# Altium PCB optronik.PcbDoc (part 1 of 2)
Units mm, origin at the board's own origin, x right, y up, seen from the top; angles counter-clockwise.
Board outline 329.68 x 214.42 mm, 2 copper layers (Top Layer, Bottom Layer); 87 components, 162 nets, 420 pads, 75 vias.
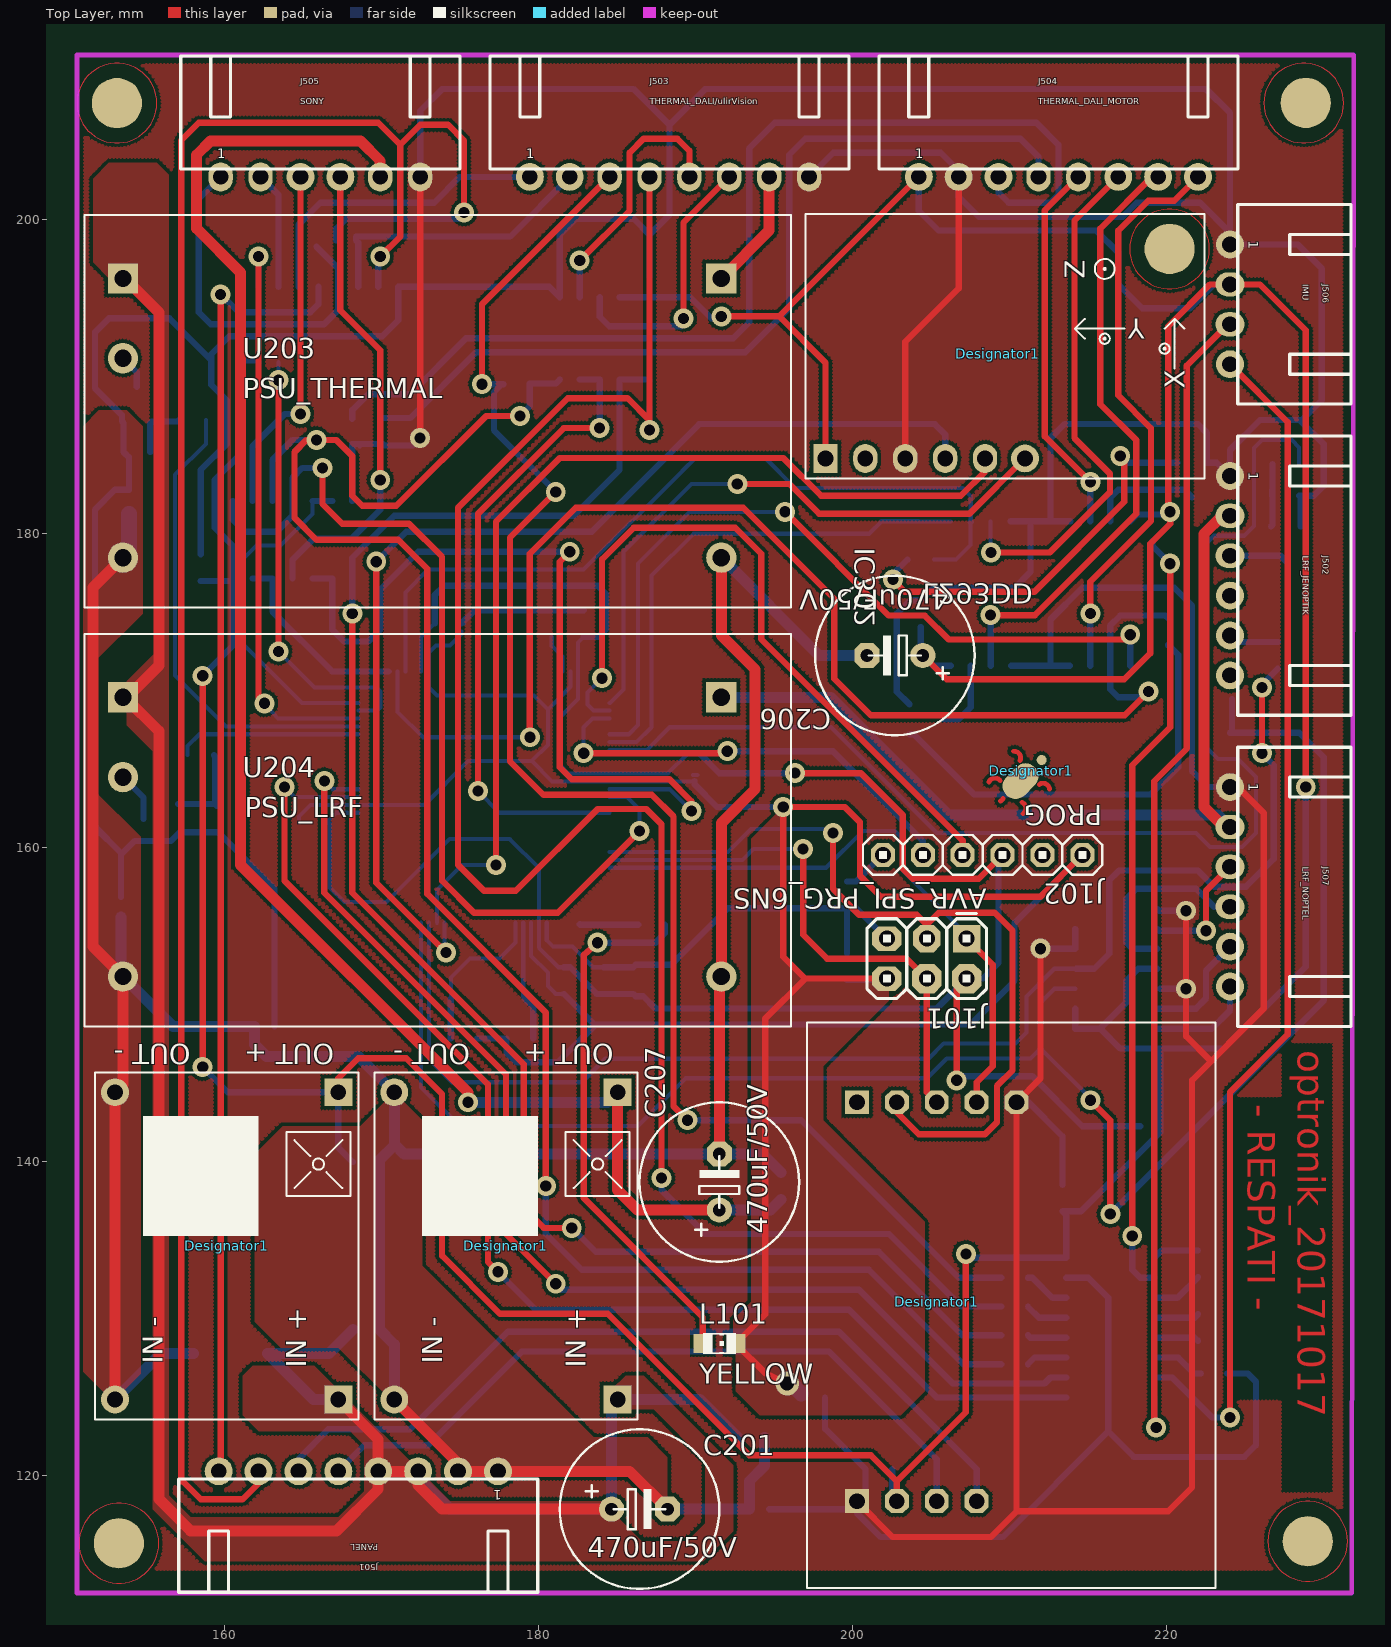
[diagram p0: Top Layer view]
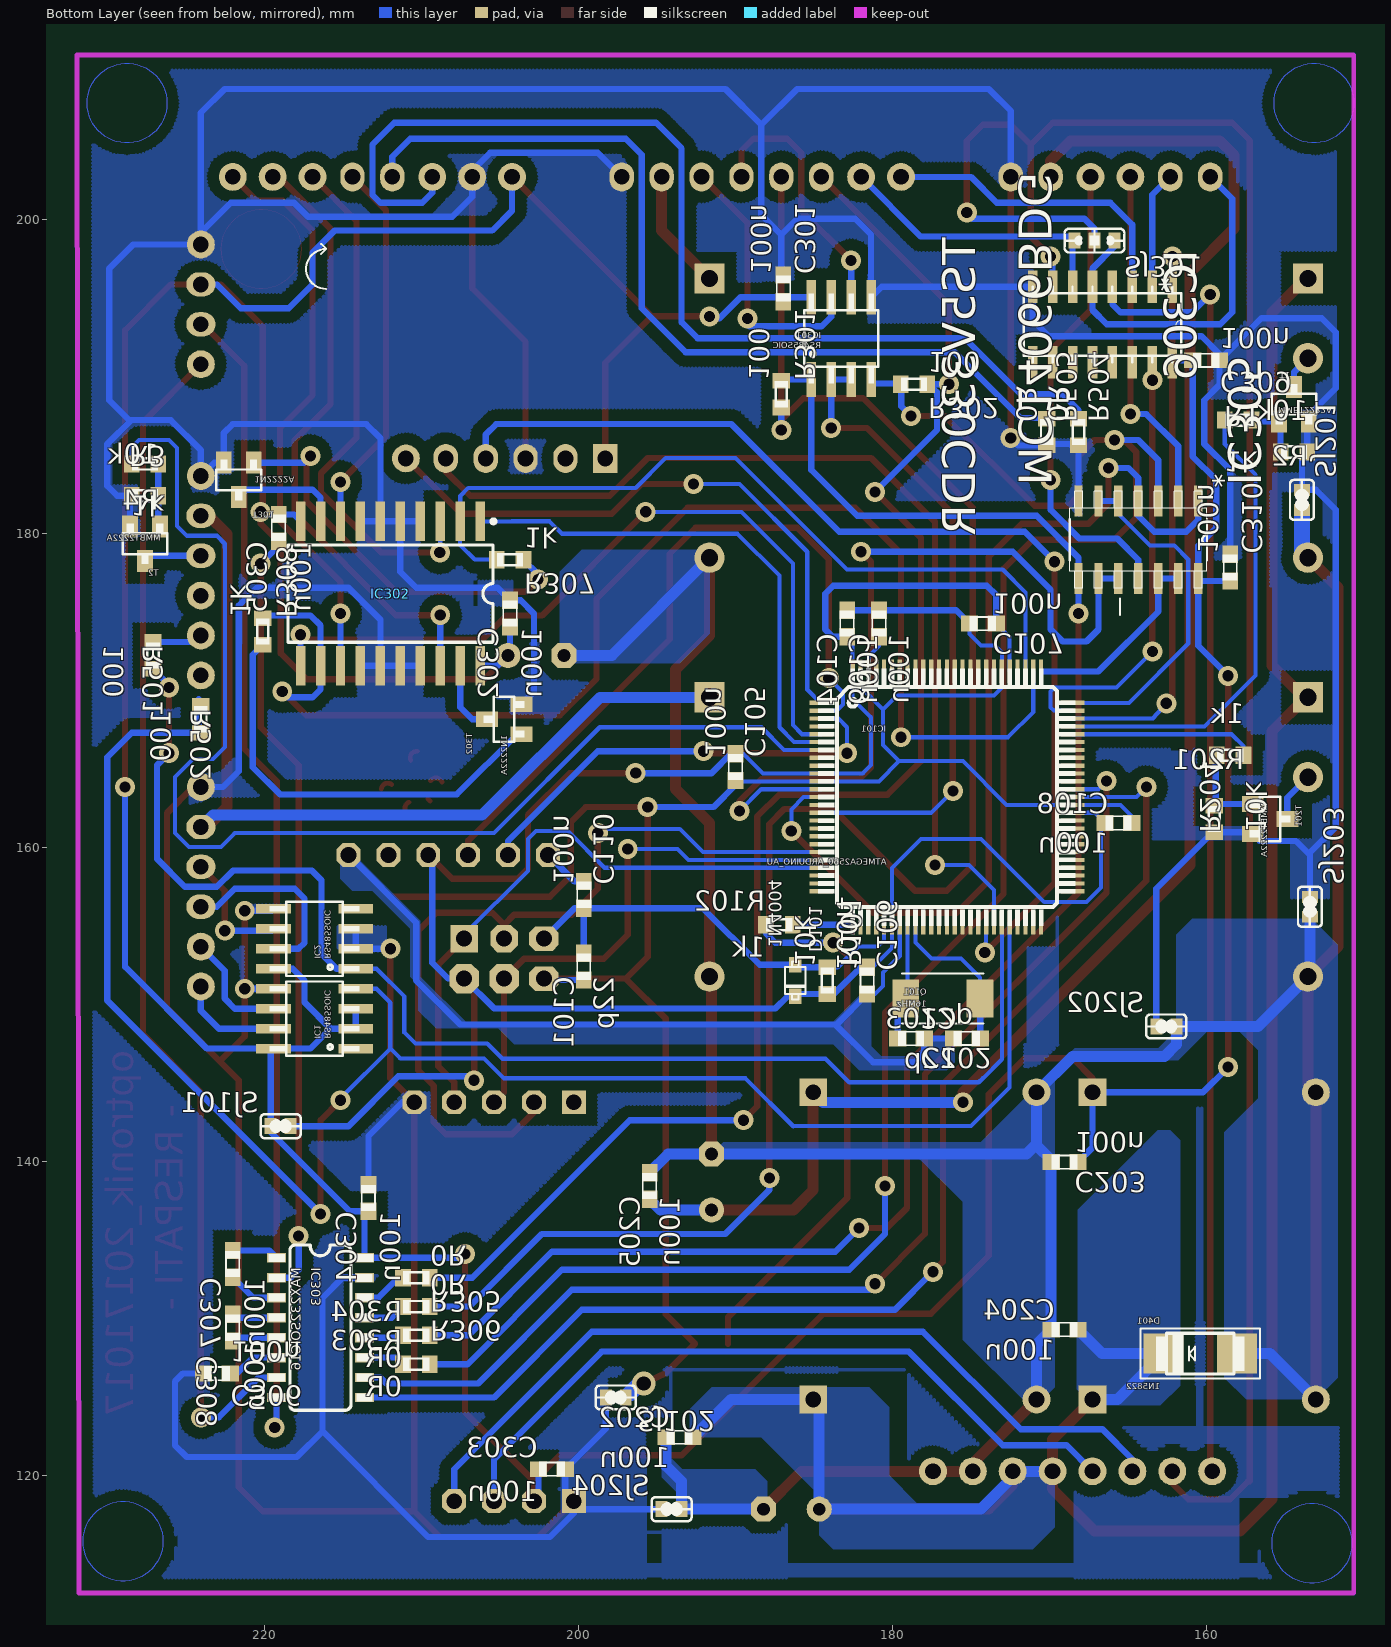
[diagram p1: Bottom Layer view, seen from below]

## Layer stack, top to bottom
Top Solder: solder mask 0.0102, Solder Resist, Dk 3.5
Top Layer: signal copper 0.0356
Dielectric1: dielectric 0.32, FR-4, Dk 4.8
Bottom Layer: signal copper 0.0356
Bottom Solder: solder mask 0.0102, Solder Resist, Dk 3.5

## Board outline
1.278,4.242 330.954,4.242 330.954,218.658 1.278,218.658

## Design rules (kind name [scope] priority, off if disabled: settings)
Clearance [All] p1: gap=0.22
FabricationTestPointUsage TestPointUsage [All] p1: valid=0 allowmultiple=FALSE
FabricationTestpoint Testpoint [All] p1: side=3 testpointundercomponent=TRUE minsize=1.016 maxsize=2.54 preferedsize=1.524 minholesize=0 maxholesize=1.016 preferedholesize=0.813 testpointgrid=0.025 allowsidetop=TRUE allowsidebottom=TRUE usegrid=TRUE gridtolerance=0
PlaneConnect [All] p1: planeconnectstyle=Direct reliefexpansion=0.508 reliefentries=4 reliefconductorwidth=0.254 reliefairgap=0.254
PolygonConnect [All] p1: connectstyle=Direct reliefconductorwidth=0.254 reliefentries=4 polygonreliefangle="90 Angle" airgapwidth=0.254
RoutingVias [All] p1: holewidth=0.711 width=1.27 viastyle="Through Hole" minholewidth=0.711 minwidth=1.27 maxholewidth=0.711 maxwidth=1.27
SolderMaskExpansion [All] p1: expansion=0.102
UnpouredPolygon [All] p1: allowunpoured=FALSE
Width [All] p1: maxlimit=1 minlimit=0.27 preferedwidth=0.27
26 further rules are at their usual default settings.

## Components (designator, comment, footprint, x,y, rotation, side; value= is the part's Value field where it differs from the comment)
C101 "22p" C0603 199.644,152.4 r270 bottom
C102 "22p" C0603 178.816,147.828 r180 bottom
C103 "22p" C0603 175.26,147.828 r0 bottom
C104 "100n" C0603 182.88,174.244 r270 bottom
C105 "100n" C0603 189.992,165.1 r90 bottom
C106 "100n" C0603 181.61,151.511 r90 bottom
C107 "100n" C0603 174.244,174.244 r180 bottom
C108 "100n" C0603 165.608,161.544 r0 bottom
C109 "100n" C0603 180.848,174.244 r270 bottom
C110 "100n" C0603 199.644,156.972 r90 bottom
C201 "470uF/50V" E3,5-10 186.436,117.856 r0 top
C202 "100n" C0603 193.548,122.428 r0 bottom
C203 "100n" C0603 169.037,139.954 r180 bottom
C204 "100n" C0603 169.037,129.286 r0 bottom
C205 "100n" C0603 195.453,138.43 r270 bottom
C206 "470uF/50V" E3,5-10 202.692,172.212 r180 top
C207 "470uF/50V" E3,5-10 191.516,138.684 r90 top
C301 "100n" C0603 186.944,195.58 r90 bottom
C302 "100n" C0603 204.343,174.879 r270 bottom
C303 "100n" C0603 201.676,120.396 r0 bottom
C304 "100n" C0603 213.36,137.668 r270 bottom
C305 "100n" C0603 219.075,180.34 r270 bottom
C306 "100n" C0603 223.012,126.492 r180 bottom
C307 "100n" C0603 221.996,133.477 r270 bottom
C308 "100n" C0603 221.996,129.413 r270 bottom
C309 "100n" C0603 160.02,191.008 r180 bottom
C310 "100n" C0603 158.496,177.8 r90 bottom
D101 "1N4004" SOD-323F 186.182,151.511 r90 bottom
D401 "1N5822" SMADIODE 160.401,127.762 r0 bottom
Designator1 "Comment" KURRO-LOGO 210.693,164.211 r0 top (schematic designator U$1)
Designator1 "Comment" GY-80-MINH1 222.404,183.488 r90 top (schematic designator U1)
Designator1 "Comment" MP1584_MIN 168.529,123.571 r90 top (schematic designator U201)
Designator1 "Comment" MP1584_MIN 186.309,123.571 r90 top (schematic designator U202)
Designator1 "Comment" MCP2515_CAN2 197.104,148.844 r270 top (schematic designator U301)
IC1 "RS485SOIC" SO08#1 216.789,149.087 r90 bottom
IC2 "RS485SOIC" SO08#1 216.789,154.167 r90 bottom
IC101 "ATMEGA2560_ARDUINO_AU" TQFP-100-14X14MM 176.53,163.195 r0 bottom
IC301 "RS485SOIC" SO08#2 183.261,192.394 r0 bottom
IC302 "L293DD" SO20 211.963,176.149 r0 bottom
IC303 "MAX232SOIC16" SO016 216.408,129.413 r270 bottom
IC305 "MC14066BDG" SOIC127P600X175-14N 164.338,179.578 r90 bottom
IC306 "TS5V330CDR" SOIC127P600X175-16N 171.069,190.881 r270 bottom
J101 "AVR_SPI_PRG_6NS" 2X3-NS 204.724,152.908 r180 top
J102 "PROG" 1X06 208.28,159.512 r180 top
J501 "PANEL" XH-8-RA#1 168.529,120.269 r180 top
J502 "LRF_JENOPTIK" XH-6-RA#1 224.028,177.292 r270 top
J503 "THERMAL_DALI/ulirVision" XH-8-RA#2 188.341,202.681 r0 top
J504 "THERMAL_DALI_MOTOR" XH-8-RA#3 213.106,202.681 r0 top
J505 "SONY" XH-6-RA#2 166.116,202.681 r0 top
J506 "IMU" XH-4-RA 224.028,194.564 r270 top
J507 "LRF_NOPTEL" XH-6-RA#3 224.028,157.48 r270 top
L101 "YELLOW" CHIP-LED0805 191.516,128.397 r270 top
Q101 "16MHz" CRYSTAL-TXC-7A2 176.784,150.368 r0 bottom
R1 "1k" R0603#1 157.988,187.198 r180 bottom
R2 "10k" R0603#1 154.432,185.166 r0 bottom
R3 "1k" R0603#1 227.584,184.404 r180 bottom
R4 "10k" R0603#1 227.584,182.372 r0 bottom
R101 "10k" R0603#2 184.15,151.511 r90 bottom
R102 "1k" R0603#2 187.198,155.067 r0 bottom
R201 "1k" R0603#1 158.496,165.862 r0 bottom
R204 "10k" R0603#1 159.512,161.798 r90 bottom
R301 "100" R0603#2 187.071,188.849 r90 bottom
R302 "100" R0603#2 178.621,189.484 r180 bottom
R303 "0R" R0603#2 210.312,127.092 r0 bottom
R304 "0R" R0603#2 210.312,128.924 r0 bottom
R305 "0R" R0603#2 210.312,132.588 r180 bottom
R306 "0R" R0603#2 210.312,130.756 r180 bottom
R307 "1k" R0603#2 204.343,178.308 r180 bottom
R308 "1k" R0603#2 220.091,173.736 r90 bottom
R501 "100" R0603#1 227.076,172.212 r270 bottom
R502 "100" R0603#1 224.028,168.148 r270 bottom
R504 "0R" R0603#2 168.148,186.436 r90 bottom
R505 "0R" R0603#2 170.18,186.436 r90 bottom
SJ101 "Comment" SJS 218.948,142.24 r0 bottom
SJ102 "Comment" SJS 197.612,124.968 r180 bottom
SJ201 "Comment" SJS 153.924,182.118 r90 bottom
SJ202 "Comment" SJS 162.56,148.59 r0 bottom
SJ203 "Comment" SJS 153.416,156.21 r90 bottom
SJ204 "Comment" SJS 194.056,117.856 r0 bottom
SJ301 "Comment" SJ_2S 167.132,198.628 r180 bottom
T1 "MMBT2222A" SOT23#1 154.432,188.214 r180 bottom
T2 "MMBT2222A" SOT23#1 227.584,179.324 r0 bottom
T201 "MMBT2222A" SOT23#1 155.956,161.798 r270 bottom
T301 "1N2222A" SOT23#2 221.615,183.388 r180 bottom
T302 "1N2222A" SOT23#2 204.724,168.148 r270 bottom
U203 "PSU_THERMAL" MOD_LM2596 196.088,175.26 r0 top
U204 "PSU_LRF" MOD_LM2596 196.088,148.59 r0 top

## Footprints (in the part's own frame and the unit in brackets; to place one, negate y for a bottom-side part, rotate by r counter-clockwise, add the part's x,y. Pads: shape width x height; smd on the part's side, far side on the other; paste and mask are expansions set on the pad)
1X06 [mil]
  oct 60x60 hole 40: 1(-250,0) 2(-150,0) 3(-50,0) 4(50,0) 5(150,0) 6(250,0)
  silkscreen extent -300,-50 300,50
2X3-NS [mil]
  rect 68.9x68.9 hole 40: 1(-100,-50)
  oct 74x74 hole 40: 2(-100,50) 4(0,50)
  oct 68.9x68.9 hole 40: 3(0,-50)
  oct 74x61.02 hole 40: 5(100,-50) 6(100,50)
  silkscreen extent -150,-113 150,100
C0603 [mm]
  rect 1.1x1 smd: 1(0.85,0) 2(-0.85,0)
  silkscreen extent -0.83,-0.48 0.84,0.47
CHIP-LED0805 [mm]
  rect 1.2x1.2 smd: A(0,-1.05) C(0,1.05)
  silkscreen extent -0.68,-1.05 0.68,1.05
CRYSTAL-TXC-7A2 [mm]
  rect 1.7x2.4 smd: P$1(-2.358,0) P$2(2.358,0)
  silkscreen extent -2.6,-1.6 2.6,1.6
E3,5-10 [mil]
  round 63 hole 32: +(-70,0)
  oct 63x63 hole 32: -(70,0)
  silkscreen extent -200,-200 200,200
GY-80-MINH1 [mm]
  rect 1.85x1.55 hole 1: 1(1.27,24.13)
  oval 1.85x1.55 hole 1: 2(1.27,21.59) 3(1.27,19.05) 4(1.27,16.51) 5(1.27,13.97)
  round 1.778 hole 1: 6(1.27,11.43)
  round 3.2 smd: ""(14.605,2.223)
  Top Layer circle w0.008: c14.605,2.223 r2.54
  Top Layer circle w0.008: c14.605,2.223 r2.54
  silkscreen extent 0,0 16.83,25.4
KURRO-LOGO [mil]
  oval 100x65 smd rot 45: P$1(0,0)
  round 25 smd: P$2(53.03,53.03)
  Top Layer lines w12.01: -79.33,-2.02 cw(c-64.25,-8.62) -50.66,0.65 ; -50.2,-50.2 -43.82,-43.82 ; -17.98,74.86 cw(c-16.18,58.5) -1.34,51.39 ; 3.54,-53 cw(c-3.07,-68.07) 6.22,-81.65 ; 46.68,-8.51 cw(c56.42,-21.77) 72.83,-20.52
MCP2515_CAN2 [mil]
  rect 60x60 hole 39.37: 1(1200,125) 5(200,125)
  oct 60x60 hole 39.37: 2(1200,225) 3(1200,325) 4(1200,425) 6(200,225) 7(200,325) 8(200,425) 9(200,525)
  silkscreen extent 0,0 1417,1024
MOD_LM2596 [mil]
  rect 76x76 hole 43.31: 1(-1675,825) 2(-175,825)
  round 76 hole 43.31: 3(-1675,125) 4(-175,125) 5(-1675,625)
  silkscreen extent -1772,0 0,984
MP1584_MIN [mil]
  rect 70x70 hole 39.37: 1(50,50) 3(820.08,50)
  round 70 hole 39.37: 2(50,609.85) 4(820.08,609.85)
  silkscreen extent 0,0 870,660
R0603#1 [mm]
  rect 1x1.1 smd: 1(-0.85,0) 2(0.85,0)
  silkscreen extent -0.84,-0.43 0.84,0.43
R0603#2 [mm]
  rect 1x1.1 smd: 1(0.85,0) 2(-0.85,0)
  silkscreen extent -0.84,-0.43 0.84,0.43
SJ_2S [mil]
  rect 30x40 smd: 1(50,0) 2(0,0) 3(-50,0)
  silkscreen extent -75,-30 75,30
SJS [mil]
  rect 30x40 smd: 1(25,0) 2(-25,0)
  silkscreen extent -50,-30 50,30
SMADIODE [mil]
  rect 100x100 smd: A(-92.5,0) C(92.5,0)
  silkscreen extent -150,-63 149,63
SO08#1 [mil]
  rect 24x87 smd: 1(-75,-103) 2(-25,-103) 3(25,-103) 4(75,-103) 5(75,103) 6(25,103) 7(-25,103) 8(-75,103)
  silkscreen extent -93,-113 93,113
SO08#2 [mil]
  rect 24x87 smd: 1(75,103) 2(25,103) 3(-25,103) 4(-75,103) 5(-75,-103) 6(-25,-103) 7(25,-103) 8(75,-103)
  silkscreen extent -93,-113 93,113
SO016 [mm]
  rect 0.6x1.2 smd: 1(-4.445,-2.8) 2(-3.175,-2.8) 3(-1.905,-2.8) 4(-0.635,-2.8) 5(0.635,-2.8) 6(1.905,-2.8) 7(3.175,-2.8) 8(4.445,-2.8) 9(4.445,2.8) 10(3.175,2.8) 11(1.905,2.8) 12(0.635,2.8) 13(-0.635,2.8) 14(-1.905,2.8) 15(-3.175,2.8) 16(-4.445,2.8)
  silkscreen extent -5.26,-3.3 5.26,3.37
SO20 [mm] "Small Outline, Plastic; 20 Leads; Body Width 7.5 mm; Pitch 1.27 mm"
  rect 0.6x2.5 smd: 1(-5.715,-4.6) 2(-4.445,-4.6) 3(-3.175,-4.6) 4(-1.905,-4.6) 5(-0.635,-4.6) 6(0.635,-4.6) 7(1.905,-4.6) 8(3.175,-4.6) 9(4.445,-4.6) 10(5.715,-4.6) 11(5.715,4.6) 12(4.445,4.6) 13(3.175,4.6) 14(1.905,4.6) 15(0.635,4.6) 16(-0.635,4.6) 17(-1.905,4.6) 18(-3.175,4.6) 19(-4.445,4.6) 20(-5.715,4.6)
  silkscreen extent -6.69,-4.72 6.53,3.1
SOD-323F [mm]
  rect 1x0.8 smd: A(1,0) C(-1,0)
  silkscreen extent -1.2,-0.65 1.2,0.65
SOIC127P600X175-14N [mil]
  rect 78x21 smd: 1(97,-150) 2(97,-100) 3(97,-50) 4(97,0) 5(97,50) 6(97,100) 7(97,150) 8(-97,150) 9(-97,100) 10(-97,50) 11(-97,0) 12(-97,-50) 13(-97,-100) 14(-97,-150)
  silkscreen extent -188,-172 122,172
SOIC127P600X175-16N [mil]
  rect 81x24 smd: 1(-189,350) 2(-189,300) 3(-189,250) 4(-189,200) 5(-189,150) 6(-189,100) 7(-189,50) 8(-189,0) 9(0,0) 10(0,50) 11(0,100) 12(0,150) 13(0,200) 14(0,250) 15(0,300) 16(0,350)
  silkscreen extent -189,-22 0,372
SOT23#1 [mm]
  rect 1x1.4 smd: 1(-0.95,-1.1) 2(0.95,-1.1) 3(0,1.1)
  silkscreen extent -1.42,-1.3 1.42,1.3
SOT23#2 [mm]
  rect 1x1.4 smd: 1(0.95,1.1) 2(-0.95,1.1) 3(0,-1.1)
  silkscreen extent -1.42,-1.3 1.42,1.3
TQFP-100-14X14MM [mm]
  rect 1.5x0.27 smd: 1(8,-6) 2(8,-5.5) 3(8,-5) 4(8,-4.5) 5(8,-4) 6(8,-3.5) 7(8,-3) 8(8,-2.5) 9(8,-2) 10(8,-1.5) 11(8,-1) 12(8,-0.5) 13(8,0) 14(8,0.5) 15(8,1) 16(8,1.5) 17(8,2) 18(8,2.5) 19(8,3) 20(8,3.5) 21(8,4) 22(8,4.5) 23(8,5) 24(8,5.5) 25(8,6) 51(-8,6) 52(-8,5.5) 53(-8,5) 54(-8,4.5) 55(-8,4) 56(-8,3.5) 57(-8,3) 58(-8,2.5) 59(-8,2) 60(-8,1.5) 61(-8,1) 62(-8,0.5) 63(-8,0) 64(-8,-0.5) 65(-8,-1) 66(-8,-1.5) 67(-8,-2) 68(-8,-2.5) 69(-8,-3) 70(-8,-3.5) 71(-8,-4) 72(-8,-4.5) 73(-8,-5) 74(-8,-5.5) 75(-8,-6)
  rect 0.27x1.5 smd: 26(6,8) 27(5.5,8) 28(5,8) 29(4.5,8) 30(4,8) 31(3.5,8) 32(3,8) 33(2.5,8) 34(2,8) 35(1.5,8) 36(1,8) 37(0.5,8) 38(0,8) 39(-0.5,8) 40(-1,8) 41(-1.5,8) 42(-2,8) 43(-2.5,8) 44(-3,8) 45(-3.5,8) 46(-4,8) 47(-4.5,8) 48(-5,8) 49(-5.5,8) 50(-6,8) 76(-6,-8) 77(-5.5,-8) 78(-5,-8) 79(-4.5,-8) 80(-4,-8) 81(-3.5,-8) 82(-3,-8) 83(-2.5,-8) 84(-2,-8) 85(-1.5,-8) 86(-1,-8) 87(-0.5,-8) 88(0,-8) 89(0.5,-8) 90(1,-8) 91(1.5,-8) 92(2,-8) 93(2.5,-8) 94(3,-8) 95(3.5,-8) 96(4,-8) 97(4.5,-8) 98(5,-8) 99(5.5,-8) 100(6,-8)
  silkscreen extent -8.2,-8.2 8.2,8.2
XH-4-RA [mm]
  round 1.778 hole 1: 1(-3.81,0) 4(3.81,0)
  oval 1.55x1.85 hole 1: 2(-1.27,0) 3(1.27,0)
  silkscreen extent -6.35,0.5 6.35,7.7
XH-6-RA#1 [mm]
  round 1.778 hole 1: 1(-6.35,0) 4(1.27,0) 5(3.81,0) 6(6.35,0)
  oval 1.55x1.85 hole 1: 2(-3.81,0) 3(-1.27,0)
  silkscreen extent -8.89,0.5 8.89,7.7
XH-6-RA#2 [mm]
  oval 1.55x1.85 hole 1: 1(-6.35,0) 2(-3.81,0) 5(3.81,0) 6(6.35,0)
  round 1.778 hole 1: 3(-1.27,0) 4(1.27,0)
  silkscreen extent -8.89,0.5 8.89,7.7
XH-6-RA#3 [mm]
  round 1.778 hole 1: 1(-6.35,0) 5(3.81,0) 6(6.35,0)
  oval 1.55x1.85 hole 1: 2(-3.81,0) 3(-1.27,0) 4(1.27,0)
  silkscreen extent -8.89,0.5 8.89,7.7
XH-8-RA#1 [mil]
  round 70 hole 39.37: 1(-350,0) 2(-250,0) 3(-150,0) 4(-50,0) 5(50,0) 6(150,0) 7(250,0) 8(350,0)
  silkscreen extent -450,20 450,303
XH-8-RA#2 [mil]
  round 70 hole 39.37: 1(-350,0) 2(-250,0)
  oval 61.02x72.83 hole 39.37: 3(-150,0) 4(-50,0) 5(50,0) 6(150,0) 7(250,0) 8(350,0)
  silkscreen extent -450,20 450,303
XH-8-RA#3 [mil]
  round 70 hole 39.37: 1(-350,0) 2(-250,0) 3(-150,0) 6(150,0) 7(250,0) 8(350,0)
  oval 61.02x72.83 hole 39.37: 4(-50,0) 5(50,0)
  silkscreen extent -450,20 450,303

## Free pads (board coordinates)
  round 3.2 smd: ""(153.162,207.38) ""(153.289,115.686) ""(228.854,207.391) ""(228.981,115.813)

## Via types
v1: diameter 1.27, hole 0.711, Top Layer to Bottom Layer, 74 vias
v2: diameter 1.5, hole 0.9, Top Layer to Bottom Layer, 1 vias

## Nets (pads, with @x,y where several pads share a name; then routed paths per layer and width w, separated by ;. In a path a pad name is that pad's centre, name@x,y a point inside that pad or via, vN(x,y) a via of type N, cw(c..) or ccw(c..) an arc to the next point about the centre after c; other vN are vias at no path point)
0V: C101.1 C102.1 C103.1 C104.2 C105.2 C106.2 C107.2 C108.2 C109.2 IC101.11 IC101.32 IC101.62 IC101.81 IC101.99 J101.6 J102.1 L101.C SJ102.1 | length 192.6
  Top Layer w0.4: v2(195.834,125.857) 194.471,126.492 L101.C@192.566,128.397 194.437,130.268 194.437,149.098 196.977,151.638 ; J101.6@202.184,151.638 196.977,151.638 ; J102.1@214.63,159.512 211.963,156.845 201.803,156.845 200.474,158.174 200.474,161.603 199.517,162.56 v1(195.58,162.56) 195.58,153.035 196.977,151.638
  Bottom Layer w0.26: C108.2@164.758,161.544 164.758,161.964 165.489,162.695 172.728,162.695 175.514,165.481 179.566,165.481 180.594,166.509 180.594,168.783 ; 175.094,173.736 175.094,173.57 174.371,172.847 173.482,172.847 173.03,172.395 173.03,170.18 173.538,169.672 179.705,169.672 180.594,168.783 ; C107.2@175.094,174.244 C107.2@175.26,174.244 ; IC101.32@179.53,155.195 179.53,153.083 180.594,152.019 180.594,151.169 181.102,150.661 C106.2@181.61,150.661 ; 179.578,165.481 180.864,164.195 189.937,164.195 C105.2@189.992,164.25 ; IC101.99@182.03,171.195 182.03,170.219 180.594,168.783 ; C105.2@189.826,164.592 C105.2@190.119,164.592
  Bottom Layer w0.4: C107.2@175.094,174.244 175.944,175.094 C104.2@182.88,175.094 ; C103.1@176.11,147.828 C102.1@177.966,147.828 177.966,146.925 178.587,146.304 181.229,146.304 183.642,148.717 ; C106.2@181.61,150.661 183.554,148.717 207.518,148.717 210.312,151.511 210.312,155.194 J102.1@214.63,159.512 ; C105.2@189.937,164.195 189.937,164.012 191.389,162.56 v1(195.58,162.56) ; C101.1@199.644,151.55 202.096,151.55 J101.6@202.184,151.638
  Bottom Layer w0.7: v2(195.834,125.857) v2@196.088,125.857
  Bottom Layer w1: v2@196.088,125.857 SJ102.1@196.723,125.222
!RESET: C101.2 C110.2 D101.A IC101.30 J101.5 R101.1 | length 28.7
  Bottom Layer w0.26: IC101.30@180.53,155.195 180.53,154.076 180.936,153.67 182.169,153.67 183.478,152.361 R101.1@184.15,152.361
  Bottom Layer w0.4: R101.1@184.15,152.361 186.032,152.361 D101.A@186.182,152.511 188.452,152.511 192.063,156.122 200.24,156.122 J101.5@202.184,154.178 ; C101.2@199.644,153.25 C110.2@199.644,156.122
+5V: C104.1 C105.1 C106.1 C107.1 C108.1 D101.C IC101.10 IC101.31 IC101.61 IC101.80 IC101.100 J101.2 J102.3 R101.2 SJ101.2 | length 150.9
  Top Layer w0.4: v1(196.342,164.719) 200.533,164.719 203.2,162.052 203.2,158.623 203.835,157.988 208.026,157.988 J102.3@209.55,159.512 ; v1(206.629,145.161) 206.629,151.003 J101.2@207.264,151.638
  Bottom Layer w0.26: C108.1@166.458,161.544 167.109,162.195 IC101.61@168.53,162.195 ; C108.1@166.712,161.544 166.712,157.443 167.64,156.515 170.332,156.515 174.35,160.532 178.169,160.532 180.03,158.672 IC101.31@180.03,155.195 180.03,153.599 181.268,152.361 C106.1@181.61,152.361 ; IC101.80@172.53,171.195 172.53,173.38 C107.1@173.394,174.244 ; C104.1@182.88,173.394 182.53,173.044 182.53,169.449 181.356,168.275 181.356,165.227 181.888,164.695 188.229,164.695 189.484,165.95 C105.1@189.992,165.95 ; R101.2@183.716,150.661 R101.2@184.15,150.661 ; J101.2@207.264,151.511 J101.2@207.264,151.638
  Bottom Layer w0.4: C107.1@173.394,174.244 173.394,176.061 173.99,176.657 183.769,176.657 184.277,176.149 184.277,173.863 183.808,173.394 C104.1@182.88,173.394 ; C106.1@181.61,152.361 182.016,152.361 183.716,150.661 186.032,150.661 D101.C@186.182,150.511 186.674,150.511 187.452,149.733 205.359,149.733 J101.2@207.264,151.638 208.28,151.638 209.296,152.654 209.296,159.258 J102.3@209.55,159.512 ; C105.1@190.285,165.95 191.516,164.719 v1(196.342,164.719) ; v1(206.629,145.161) 206.883,145.415 211.455,145.415 214.63,142.24 SJ101.2@218.313,142.24
+24V: C201.+ C202.2 C204.2 D401.C Designator1.1@167.259,124.841 Designator1.1@185.039,124.841 J501.3 J501.4 U203.1 U204.1 | length 164.3
  Top Layer w0.4: Designator1.1@184.658,124.46 Designator1.1@185.039,124.841
  Top Layer w0.7: U204.1@153.543,169.545 153.797,169.545 155.829,171.577 155.829,194.056 153.67,196.215 U203.1@153.543,196.215 ; U204.1@153.67,169.545 155.829,167.386 155.829,118.491 157.861,116.459 167.132,116.459 169.799,119.126 169.799,122.301 Designator1.1@167.259,124.841 Designator1.1@167.005,124.841 ; J501.4@169.799,120.269 J501.3@172.339,120.269 172.339,119.38 173.863,117.856 C201.+@184.658,117.856
  Bottom Layer w0.7: Designator1.1@167.259,124.841 165.671,124.841 D401.C@162.75,127.762 166.663,127.762 C204.2@168.187,129.286 ; J501.4@169.799,120.269 J501.3@172.339,120.269 172.339,119.888 174.371,117.856 C201.+@184.658,117.856 184.658,124.46 Designator1.1@185.039,124.841 190.285,124.841 C202.2@192.698,122.428
AREF: C109.1 IC101.98 | length 2.5
  Bottom Layer w0.26: C109.1@180.848,173.394 180.848,172.822 181.53,172.14 IC101.98@181.53,171.195
BUS_CANH: Designator1.3@205.359,118.364 J501.5 | length 46.8
  Bottom Layer w0.4: J501.5@167.259,120.269 168.91,121.92 172.974,121.92 178.943,127.889 198.501,127.889 205.359,121.031 Designator1.3@205.359,118.364
BUS_CANL: Designator1.4@207.899,118.364 J501.6 | length 53
  Bottom Layer w0.4: J501.6@164.719,120.269 164.719,121.031 166.624,122.936 171.831,122.936 178.054,129.159 199.136,129.159 207.899,120.396 Designator1.4@207.899,118.364
CAM_ENABLE: IC101.74 IC306.15 | length 28.7
  Top Layer w0.26: v1@163.449,172.212 v1(163.449,172.466)
  Top Layer w0.4: v1(163.449,172.466) v1(163.449,189.738)
  Bottom Layer w0.26: v1(163.449,172.466) 165.735,170.18 169.672,170.18 169.926,169.926 169.926,168.91 169.711,168.695 IC101.74@168.53,168.695 ; v1(163.449,189.738) IC306.15@163.449,190.881
CAM_SELECT: IC101.73 IC306.1 | length 36.9
  Top Layer w0.4: v1(162.179,197.612) 162.179,169.545 v1(162.56,169.164)
  Bottom Layer w0.26: v1(162.56,169.164) 163.42,168.195 IC101.73@168.53,168.195
  Bottom Layer w0.4: IC306.1@162.179,195.682 v1(162.179,197.612)
CAN_INT: Designator1.5@200.279,143.764
GND: C301.1 C302.2 C303.2 C304.2 C306.2 C309.1 C310.1 Designator1.1@200.279,118.364 Designator1.3@203.354,184.758 Designator1.9 IC1.5 IC2.2 IC2.3 IC2.5 IC301.5 IC302.4 IC302.5 IC302.6 IC302.7 IC302.14 IC302.15 IC302.16 IC302.17 IC303.15 IC305.7 IC306.8 J502.1 J503.8 J504.2 J505.6 J506.1 J507.1 R2.1 R4.2 R204.1 R504.2 R505.2 SJ102.2 SJ201.1 SJ202.1 SJ203.1 SJ204.1 T1.2 T2.2 T201.2 T301.2 T302.2 | length 572.4
  Top Layer w0.4: v1(172.466,186.055) J505.6@172.466,202.681 ; Designator1.1@200.279,118.364 202.565,116.078 208.788,116.078 210.439,117.729 ; Designator1.3@203.354,184.758 203.354,192.178 206.756,195.58 J504.2@206.756,202.681 ; v1(211.963,153.543) 211.963,145.288 Designator1.9@210.439,143.764 210.439,117.729 ; v1(221.234,155.956) 221.234,147.955 222.758,146.431 ; J507.1@224.536,163.83 226.187,162.179 226.187,149.733 221.615,145.161 221.615,119.253 220.091,117.729 210.439,117.729
  Bottom Layer w0.26: R504.2@168.602,185.532 R504.2@168.639,185.522 ; Designator1.1@200.279,118.364 Designator1.1@200.863,118.364 ; IC1.5@219.405,150.992 IC1.5@219.583,150.992 ; J506.1@224.028,198.374 J506.1@224.028,198.501 ; R4.2@228.434,182.372 228.534,182.372 T2.2@228.534,180.932
  Bottom Layer w0.4: SJ203.1@153.416,156.845 153.416,159.639 151.765,161.29 151.765,181.483 153.035,182.753 SJ201.1@153.924,182.753 153.924,184.824 R2.1@153.582,185.166 153.582,187.014 T1.2@153.482,187.114 153.482,187.513 151.765,189.23 151.765,192.786 152.654,193.675 156.503,193.675 C309.1@159.17,191.008 ; 153.416,159.512 154.305,160.401 156.609,160.401 157.156,160.948 159.6,160.948 163.195,157.353 SJ202.1@163.195,148.59 ; C310.1@158.496,178.65 158.496,184.023 160.147,185.674 160.147,188.468 159.17,189.445 159.17,191.389 160.313,192.532 170.053,192.532 171.069,193.548 IC306.8@171.069,195.682 180.685,195.682 IC301.5@181.356,195.01 181.356,199.009 182.372,200.025 186.055,200.025 187.071,199.009 ; IC305.7@168.148,182.042 168.148,185.674 170.092,185.674 R505.2@170.18,185.586 171.997,185.586 v1(172.466,186.055) ; J505.6@172.466,202.681 172.466,206.883 173.863,208.28 186.055,208.28 188.341,205.994 ; C301.1@187.071,196.303 187.071,199.009 ; SJ204.1@194.691,117.856 199.771,117.856 200.826,118.911 C303.2@200.826,120.396 198.247,122.975 SJ102.2@198.247,124.968 ; J503.8@197.231,202.681 198.766,204.216 205.613,204.216 J504.2@206.756,203.073 ; Designator1.1@200.279,118.364 200.279,117.602 201.803,116.078 209.55,116.078 216.281,122.809 ; T302.2@203.624,169.098 202.819,169.903 202.819,174.879 203.669,175.729 C302.2@204.343,175.729 205.144,176.53 210.312,176.53 211.328,177.546 IC302.5@211.328,180.749 ; J504.2@206.756,202.681 206.756,201.422 208.026,200.152 217.208,200.152 218.097,201.041 222.123,201.041 224.028,199.136 J506.1@224.028,198.501 ; IC302.4@210.058,180.749 IC302.7@213.868,180.749 ; IC302.17@210.108,171.549 IC302.14@213.818,171.549 ; Designator1.9@210.439,143.764 211.201,143.764 213.36,141.605 C304.2@213.36,138.518 ; v1(211.963,153.543) 211.974,153.532 IC2.2@214.173,153.532 IC2.3@214.173,154.802 ; IC302.15@212.598,171.549 212.598,174.498 214.63,176.53 220.472,176.53 221.615,175.387 221.615,164.846 222.631,163.83 J507.1@224.028,163.83 ; IC302.6@212.598,180.749 212.598,186.055 213.487,186.944 221.996,186.944 222.565,186.375 T301.2@222.565,184.488 223.182,184.488 J502.1@224.155,183.515 ; IC303.15@213.608,132.588 215.011,132.588 216.281,131.318 216.281,122.809 ; IC2.5@219.405,156.072 219.521,155.956 v1(221.234,155.956) ; IC1.5@219.583,150.992 v1(221.234,150.992) ; C306.2@223.862,126.492 225.171,126.492 225.679,125.984 225.679,121.92 224.942,121.183 217.907,121.183 216.281,122.809 ; J502.1@224.028,183.642 224.028,185.293 225.933,187.198 228.6,187.198 229.87,188.468 229.87,196.85 228.346,198.374 J506.1@224.028,198.374 224.028,206.756 222.504,208.28 190.627,208.28 188.341,205.994 ; 228.473,187.198 229.997,185.674 229.997,183.007 229.362,182.372 R4.2@228.434,182.372 228.534,182.272 T2.2@228.534,180.424 ; 187.071,199.009 188.341,200.279 188.341,205.994
IMU_INT: Designator1.6@210.974,184.758 IC101.1 | length 39.6
  Top Layer w0.4: v1(192.659,183.134) 195.961,183.134 197.866,181.229 207.445,181.229 Designator1.6@210.974,184.758
  Bottom Layer w0.26: IC101.1@184.53,169.195 184.562,169.195 185.42,170.053 185.42,178.816
  Bottom Layer w0.27: 185.42,178.816 189.738,183.134 v1(192.659,183.134)
IMU_RX: IC303.7 J506.4 | length 76
  Top Layer w0.4: v1(224.028,123.698) 224.028,144.402 227.711,148.085 227.711,187.071 J506.4@224.028,190.754
  Bottom Layer w0.4: IC303.7@219.208,126.238 220.345,126.238 222.885,123.698 v1(224.028,123.698)
IMU_RXD: IC101.64 IC303.10 | length 75.8
  Top Layer w0.4: v1(166.37,164.211) 166.37,157.099 177.927,145.542 177.927,135.382 v1(181.102,132.207)
  Bottom Layer w0.26: v1(166.37,164.211) 166.886,163.695 IC101.64@168.53,163.695
  Bottom Layer w0.4: v1(181.102,132.207) 181.483,131.826 200.406,131.826 206.375,125.857 212.217,125.857 212.598,126.238 IC303.10@213.608,126.238
IMU_TX: IC303.8 J506.3 | length 74.3
  Top Layer w0.4: v1(219.329,123.063) 219.202,123.469 219.202,164.211 221.273,166.282 221.273,190.666 223.901,193.294 J506.3@224.028,193.294
  Bottom Layer w0.4: IC303.8@219.208,124.968 219.208,123.184 v1(219.329,123.063)
IMU_TXD: IC101.63 IC303.9 | length 81
  Top Layer w0.4: v1(163.83,163.83) 163.83,157.861 176.784,144.907 176.784,133.604 v1(177.419,132.969)
  Bottom Layer w0.26: v1(163.83,163.83) 164.465,163.195 IC101.63@168.53,163.195
  Bottom Layer w0.4: v1(177.419,132.969) 179.832,130.556 199.771,130.556 205.359,124.968 IC303.9@213.608,124.968
LRF_ENABLE: IC101.7 R3.1 | length 78.6
  Bottom Layer w0.26: IC101.7@184.53,166.195 186.896,166.195 188.341,167.64 197.612,167.64 ; 205.74,160.909 221.869,160.909 222.758,160.02 224.79,160.02 225.679,160.909 225.679,164.465 224.536,165.608 223.266,165.608 222.504,166.37 222.504,179.07 ; 223.012,179.832 224.917,179.832 225.552,180.467 225.552,185.42 226.06,185.928 227.965,185.928 228.434,185.459 R3.1@228.434,184.404
  Bottom Layer w0.27: 197.612,167.64 198.628,167.64 205.359,160.909 205.74,160.909 ; 222.504,179.07 222.504,179.324 223.012,179.832
LRF_PWR_ENABLE: IC101.71 R201.1 | length 11.8
  Bottom Layer w0.26: R201.1@157.646,165.862 157.646,166.435 158.407,167.195 IC101.71@168.53,167.195
LRF_RX_A: IC1.6 J507.5 | length 7.3
  Bottom Layer w0.4: IC1.6@219.405,149.722 221.858,149.722 222.504,150.368 222.504,152.146 J507.5@224.028,153.67
LRF_RX_B: IC1.7 J507.6 | length 6.6
  Bottom Layer w0.4: IC1.7@219.405,148.452 222.874,148.452 224.028,149.606 J507.6@224.028,151.13
LRF_RXD: IC1.4 IC101.46 R502.2 | length 112.2
  Top Layer w0.4: v1(215.138,143.891) 216.408,142.621 v1(216.408,136.652)
  Bottom Layer w0.26: IC101.46@172.53,155.195 172.53,144.716 175.006,142.24 186.309,142.24
  Bottom Layer w0.27: 186.309,142.24 189.357,145.288 204.724,145.288 205.994,146.558 211.328,146.558 211.963,147.193 ; IC1.4@214.173,150.992 212.852,150.992 211.963,150.103 211.963,147.193 ; v1(215.138,143.891) 215.138,144.018 211.963,147.193
  Bottom Layer w0.4: v1(216.408,136.652) 229.997,150.241 229.997,165.735 228.434,167.298 R502.2@224.028,167.298
LRF_TX_A: IC2.6 J507.3 | length 7.8
  Top Layer w0.4: v1(222.504,154.686) 222.504,157.226 J507.3@224.028,158.75
  Bottom Layer w0.4: IC2.6@219.405,154.802 219.521,154.686 v1(222.504,154.686)
LRF_TX_B: IC2.7 J507.4 | length 12.3
  Bottom Layer w0.4: IC2.7@219.405,153.532 217.816,153.532 217.424,153.924 217.424,156.718 218.059,157.353 221.869,157.353 223.012,156.21 J507.4@224.028,156.21
LRF_TXD: IC2.1 IC101.45 R501.2 | length 86.8
  Top Layer w0.4: v1(226.06,165.989) v1(226.06,170.18)
  Bottom Layer w0.26: IC101.45@173.03,155.195 173.03,146.502 174.244,145.288 ; 212.841,152.262 IC2.1@214.249,152.262
  Bottom Layer w0.27: 174.244,145.288 174.498,145.034 182.753,145.034 184.251,146.532 204.825,146.532 205.798,147.505 210.37,147.505 211.074,148.209 211.074,150.495 212.841,152.262
  Bottom Layer w0.4: IC2.1@214.249,152.262 215.392,152.262 216.348,153.218 216.348,157.902 216.967,158.521 221.971,158.521 223.012,157.48 225.044,157.48 226.822,159.258 226.822,165.227 v1(226.06,165.989) ; v1(226.06,170.18) 226.06,170.346 R501.2@227.076,171.362
LRF_VDD: J502.2 J507.2 U204.2 | length 57.5
  Top Layer w0.7: J507.2@224.028,161.29 223.647,161.29 222.377,162.56 222.377,179.959 223.52,181.102 J502.2@224.028,181.102
  Bottom Layer w0.7: U204.2@191.643,169.545 198.628,169.545 206.121,162.052 223.266,162.052 J507.2@224.028,161.29
MISO: Designator1.8 IC101.22 J101.1 | length 39.4
  Top Layer w0.4: J101.1@207.264,154.178 208.915,152.527 208.915,146.05 207.899,145.034 Designator1.8@207.899,143.764
  Bottom Layer w0.26: IC101.22@184.53,158.695 198.319,158.695 200.66,161.036 202.692,161.036 203.2,160.528 203.2,158.496 207.264,154.432 J101.1@207.264,154.178
MOSI: Designator1.7 IC101.21 J101.4 | length 35.4
  Top Layer w0.26: J101.4@204.597,151.638 J101.4@204.724,151.638
  Top Layer w0.4: v1(196.85,159.893) 196.85,154.432 198.374,152.908 203.454,152.908 J101.4@204.724,151.638 204.724,144.399 Designator1.7@205.359,143.764
  Bottom Layer w0.26: IC101.21@184.53,159.195 192.977,159.195 193.675,159.893 v1(196.85,159.893)
N$1: IC101.26 R102.2 | length 3.7
  Bottom Layer w0.4: IC101.26@182.625,155.1 182.658,155.067 R102.2@186.348,155.067
N$2: C307.1 IC303.3 | length 3.3
  Bottom Layer w0.4: IC303.3@219.208,131.318 220.687,131.318 C307.1@221.996,132.627
N$3: J502.5 R501.1 | length 3.2
  Bottom Layer w0.4: J502.5@224.028,173.482 224.448,173.062 R501.1@227.076,173.062
N$4: J502.6 R502.1 | length 1.9
  Bottom Layer w0.4: 224.155,167.474 R502.1@224.155,169.418
N$5: IC303.14 R305.2 | length 3
  Bottom Layer w0.4: R305.2@211.162,132.588 211.455,132.588 212.725,131.318 IC303.14@213.608,131.318
N$6: IC303.13 R306.2 | length 2.7
  Bottom Layer w0.4: R306.2@211.162,130.756 211.87,130.048 IC303.13@213.608,130.048
N$7: IC303.11 R303.1 | length 2.6
  Bottom Layer w0.4: R303.1@211.162,127.092 211.578,127.508 IC303.11@213.608,127.508
N$8: C306.1 IC303.6 | length 3.4
  Bottom Layer w0.4: IC303.6@219.208,127.508 220.726,127.508 221.742,126.492 C306.1@222.162,126.492
N$9: IC303.12 R304.1 | length 2.5
  Bottom Layer w0.4: R304.1@211.162,128.924 211.308,128.778 IC303.12@213.608,128.778
N$10: IC101.14
N$11: C307.2 IC303.1 | length 3
  Bottom Layer w0.4: IC303.1@219.208,133.858 219.677,134.327 C307.2@221.996,134.327
N$12: J502.3 T2.3 | length 3.7
  Bottom Layer w0.4: J502.3@224.028,178.562 227.246,178.562 T2.3@227.584,178.224
N$13: L101.A R102.1 | length 34.2
  Top Layer w0.4: v1@183.744,154.026 v1(183.769,153.924) 182.88,153.137 182.88,137.668 190.466,130.082 L101.A@190.466,128.397
  Bottom Layer w0.4: v1(183.769,153.924) 187.452,153.924 188.048,154.52 R102.1@188.048,155.067